# Altium PCB PCB1.PcbDoc
Units mm, origin at the board's own origin, x right, y up, seen from the top; angles counter-clockwise.
Board outline 50.04 x 25.02 mm, 2 copper layers (Top Layer, Bottom Layer); 10 components, 10 nets, 30 pads, 0 vias.
Unrouted connection lines stored in the file: 3.
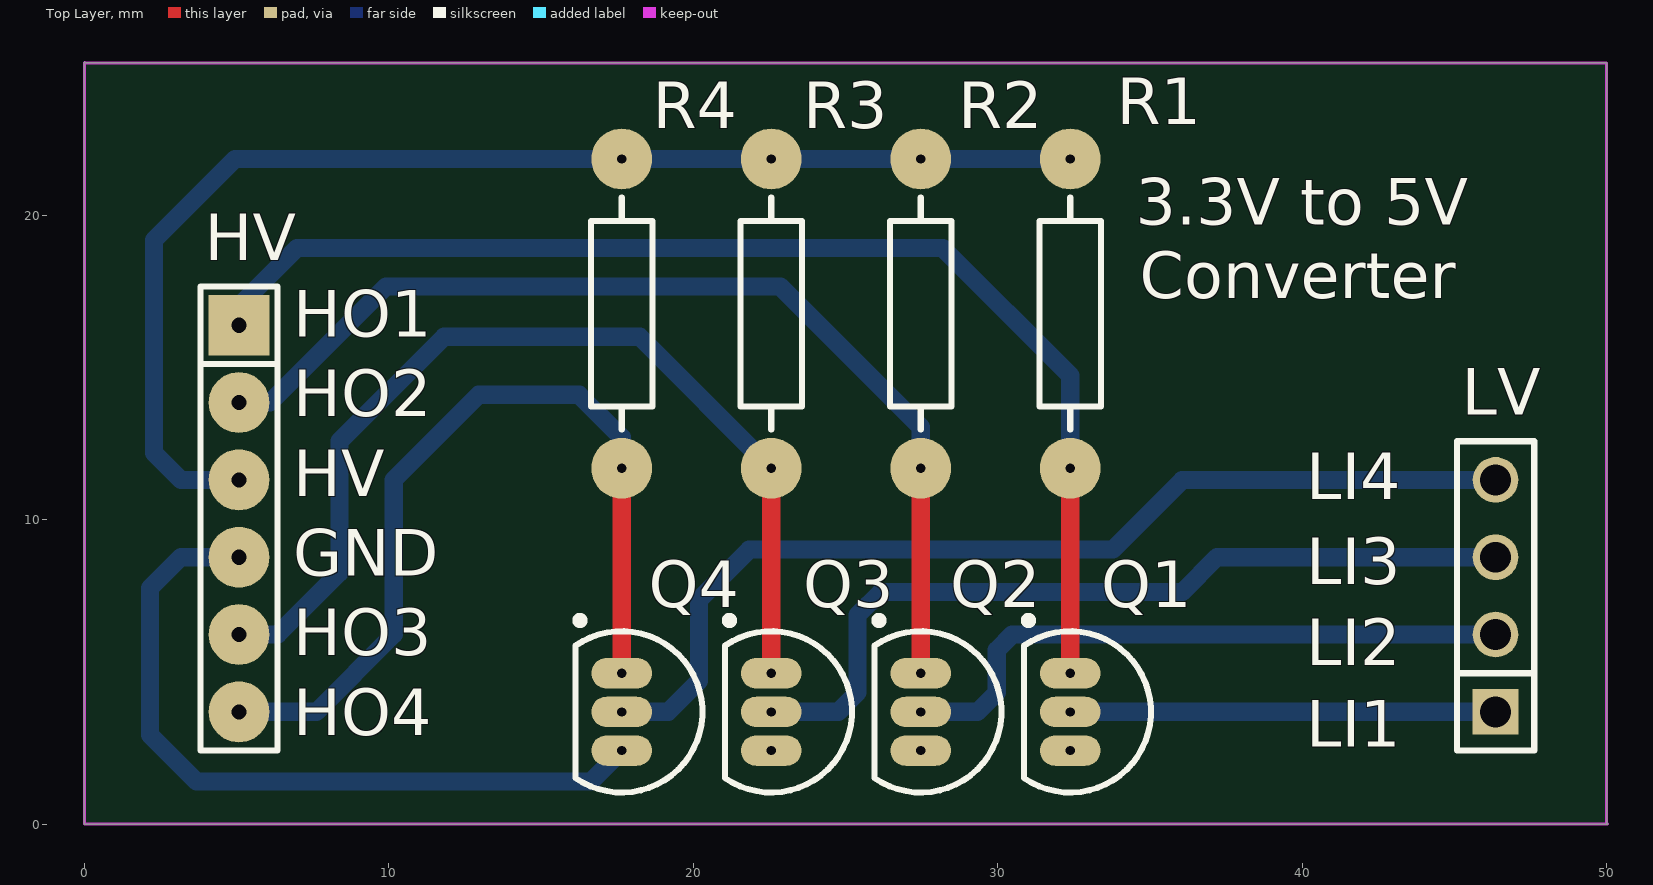
[diagram p0: Top Layer view]
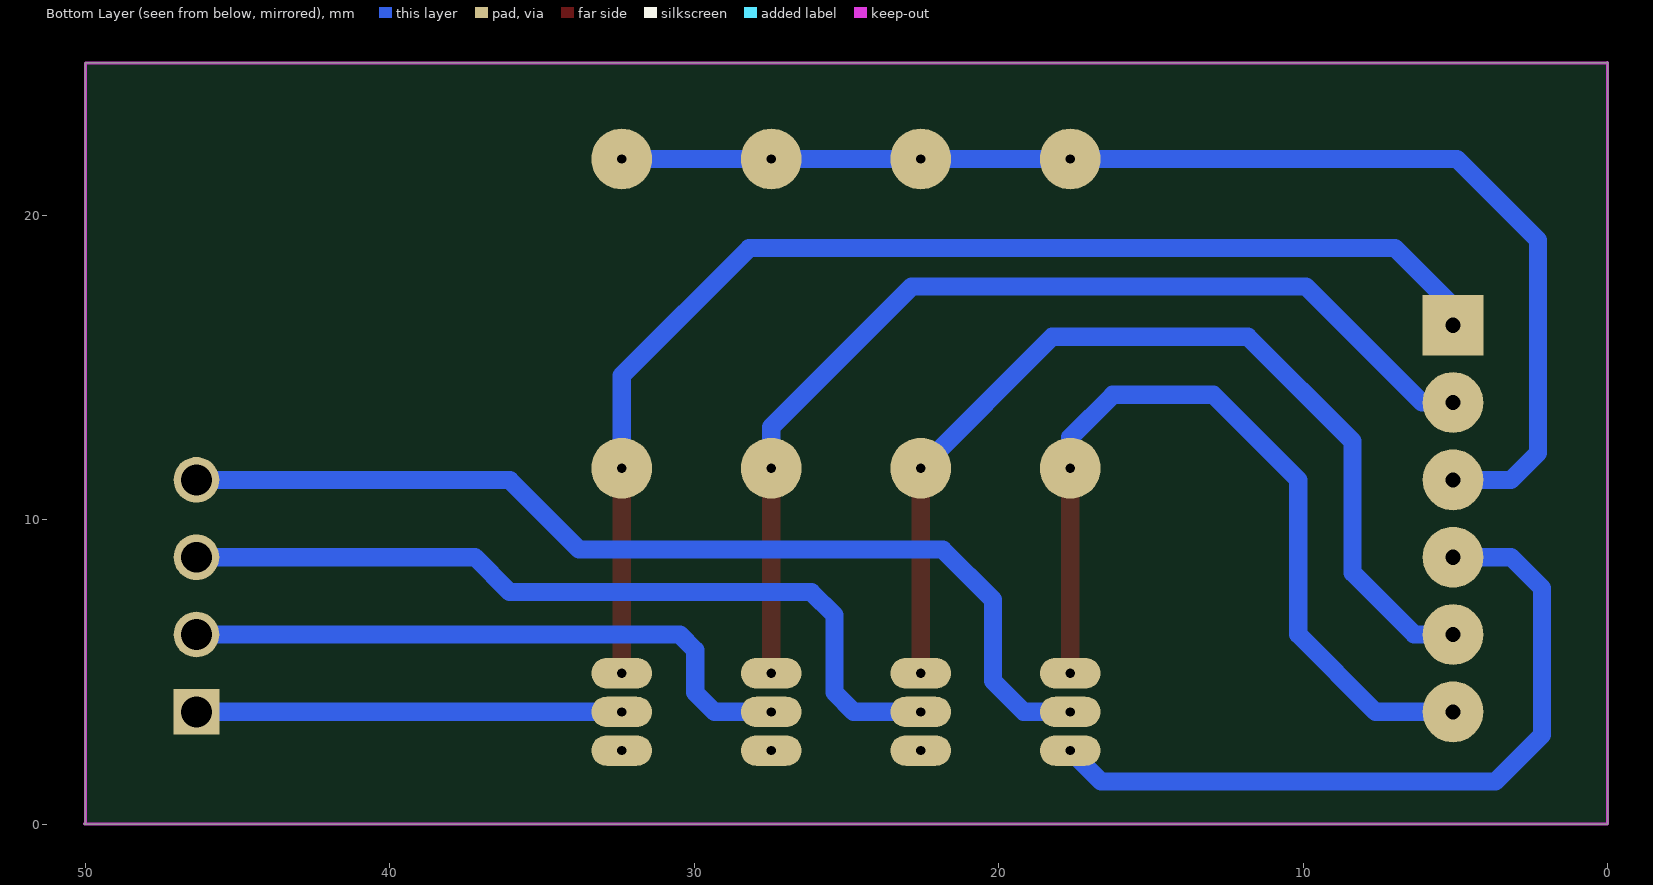
[diagram p1: Bottom Layer view, seen from below]

## Layer stack, top to bottom
Top Solder: solder mask 0.0102, Solder Resist, Dk 3.5
Top Layer: signal copper 0.0356
Dielectric 1: dielectric 0.32, FR-4, Dk 4.8
Bottom Layer: signal copper 0.0356
Bottom Solder: solder mask 0.0102, Solder Resist, Dk 3.5

## Board outline
0,0 50.038,0 50,0.038 50,25 0.019,25 0,25.019

## Design rules (kind name [scope] priority, off if disabled: settings)
Clearance [All] p1: gap=0.2 ignorepadtopadclearanceinfootprint=FALSE
PolygonConnect [All] p1: connectstyle=Relief reliefconductorwidth=0.254 reliefentries=4 polygonreliefangle="90 Angle" airgapwidth=0.254
RoutingVias [All] p1: holewidth=0.3 width=2 viastyle="Through Hole" minholewidth=0.3 minwidth=1.5 maxholewidth=0.5 maxwidth=2
SolderMaskExpansion [All] p1: expansion=0.102
Width [All] p1: maxlimit=0.8 minlimit=0.6 preferedwidth=0.6
30 further rules are at their usual default settings.

## Components (designator, comment, footprint, x,y, rotation, side; value= is the part's Value field where it differs from the comment)
HV "CON6" SIP6 5.08,16.383 r270 top
LV "CON4" SIP4 46.355,7.493 r90 top
Q1 "NPN" TO-226-AA 32.385,3.683 r180 top
Q2 "NPN" TO-226-AA 27.474,3.683 r180 top
Q3 "NPN" TO-226-AA 22.564,3.683 r180 top
Q4 "NPN" TO-226-AA 17.653,3.683 r180 top
R1 "RES" RES400 32.385,11.684 r90 top
R2 "RES" RES400 27.474,11.684 r90 top
R3 "RES" RES400 22.564,11.684 r90 top
R4 "RES" RES400 17.653,11.684 r90 top

## Footprints (in the part's own frame and the unit in brackets; to place one, negate y for a bottom-side part, rotate by r counter-clockwise, add the part's x,y. Pads: shape width x height; smd on the part's side, far side on the other; paste and mask are expansions set on the pad)
RES400 [mm]
  round 2 hole 0.3: 1(0,0) 2(10.16,0)
  silkscreen extent 1.27,-1.02 8.89,1.02, body extent -0.3,-1.14 10.46,1.17, height 2.43
SIP4 [mm]
  rect 1.5x1.5 hole 1.016: 1(-3.81,0)
  round 1.5 hole 1.016: 2(-1.27,0) 3(1.27,0) 4(3.81,0)
  silkscreen extent -5.08,-1.27 5.08,1.27, body extent -5.08,-1.27 5.08,1.27, height 8.38
SIP6 [mm]
  rect 2x2 hole 0.5: 1(0,0)
  round 2 hole 0.5: 2(2.54,0) 3(5.08,0) 4(7.62,0) 5(10.16,0) 6(12.7,0)
  silkscreen extent -1.27,-1.27 13.97,1.27, body extent -1.27,-1.3 13.97,1.24, height 8.38
TO-226-AA [mm] "TO, Flat Index; 3 In-Line, Axial Leads; Body Dia. 4.8mm; Leads 0.55 x 0.51 mm (max)"
  oval 2x1 hole 0.3: 1(0,-1.27) 2(0,0) 3(0,1.27)
  silkscreen extent -2.65,-3.13 1.52,2.65, body extent -2.65,-2.66 1.52,2.66, height 5.33

## Part data
Q1 Q2 Q3 Q4: "NPN Bipolar Transistor", Code_JEDEC=TO-226-AA, LatestRevisionDate=17-Jul-2002, LatestRevisionNote="Re-released for DXP Platform.", PackageDescription="TO, Flat Index; 3 In-Line, Axial Leads; Body Dia. 4.8mm; Leads 0.55 x 0.51 mm (max)", PackageReference=TO-226-AA, Published=8-Jun-2000, Publisher="Altium Limited"

## Nets (pads, with @x,y where several pads share a name; then routed paths per layer and width w, separated by ;. In a path a pad name is that pad's centre, name@x,y a point inside that pad or via, vN(x,y) a via of type N, cw(c..) or ccw(c..) an arc to the next point about the centre after c; other vN are vias at no path point)
GND: HV.4 Q1.3 Q2.3 Q3.3 Q4.3 | length 24.7
  Bottom Layer w0.6: HV.4 3.175,8.763 2.159,7.747 2.159,2.921 3.683,1.397 16.637,1.397 Q4.3
HO1: HV.1 Q1.1 R1.1 | length 40.2
  Top Layer w0.6: Q1.1 R1.1
  Bottom Layer w0.6: HV.1 5.08,17.018 6.985,18.923 28.194,18.923 32.385,14.732 R1.1
HO2: HV.2 Q2.1 R2.1 | length 34
  Top Layer w0.6: Q2.1 R2.1
  Bottom Layer w0.6: HV.2 6.096,13.843 9.906,17.653 22.86,17.653 27.474,13.039 R2.1
HO3: HV.5 Q3.1 R3.1 | length 32.6
  Top Layer w0.6: Q3.1 R3.1
  Bottom Layer w0.6: HV.5 6.35,6.223 8.382,8.255 8.382,12.573 11.811,16.002 18.246,16.002 R3.1
HO4: HV.6 Q4.1 R4.1 | length 28.2
  Top Layer w0.6: Q4.1 R4.1
  Bottom Layer w0.6: HV.6 7.62,3.683 10.16,6.223 10.16,11.303 12.954,14.097 16.256,14.097 17.653,12.7 R4.1
HV: HV.3 R1.2 R2.2 R3.2 R4.2 | length 41.4
  Bottom Layer w0.6: HV.3 3.175,11.303 2.286,12.192 2.286,19.177 4.953,21.844 R4.2 R3.2 R2.2 R1.2
LI1: LV.1 Q1.2 | length 14
  Bottom Layer w0.6: Q1.2 LV.1
LI2: LV.2 Q2.2 | length 20.8
  Bottom Layer w0.6: Q2.2 29.337,3.683 29.972,4.318 29.972,5.715 30.48,6.223 LV.2
LI3: LV.3 Q3.2 | length 27.4
  Bottom Layer w0.6: Q3.2 24.765,3.683 25.4,4.318 25.4,6.858 26.162,7.62 36.068,7.62 37.211,8.763 LV.3
LI4: LV.4 Q4.2 | length 33.4
  Bottom Layer w0.6: Q4.2 19.177,3.683 20.193,4.699 20.193,7.366 21.844,9.017 33.782,9.017 36.068,11.303 LV.4

## Keep-outs
Keep-Out Layer:
  the board outline again, w0.1

## Silkscreen, mask and mechanical layers (free items; w line width, h text height)
Top Overlay:
  text "3.3V to 5V" at 34.544,19.685 h1.52
  text "Converter" at 34.671,17.272 h1.52
  text "HO1" at 6.858,16.002 h1.52
  text "HO2" at 6.858,13.386 h1.52
  text "HV" at 6.858,10.77 h1.52
  text "LI4" at 40.132,10.668 h1.52
  text "GND" at 6.858,8.153 h1.52
  text "LI3" at 40.132,7.874 h1.52
  text "HO3" at 6.858,5.537 h1.52
  text "LI2" at 40.132,5.207 h1.52
  text "HO4" at 6.858,2.921 h1.52
  text "LI1" at 40.132,2.54 h1.52